# Altium PCB AT32.PcbDoc (part 5 of 9)
Units mm, origin at the board's own origin, x right, y up, seen from the top; angles counter-clockwise.
Board outline 152.1 x 84.6 mm, 2 copper layers (Top Layer, Bottom Layer); 49 components, 58 nets, 223 pads, 0 vias.
Unrouted connection lines stored in the file: 3.
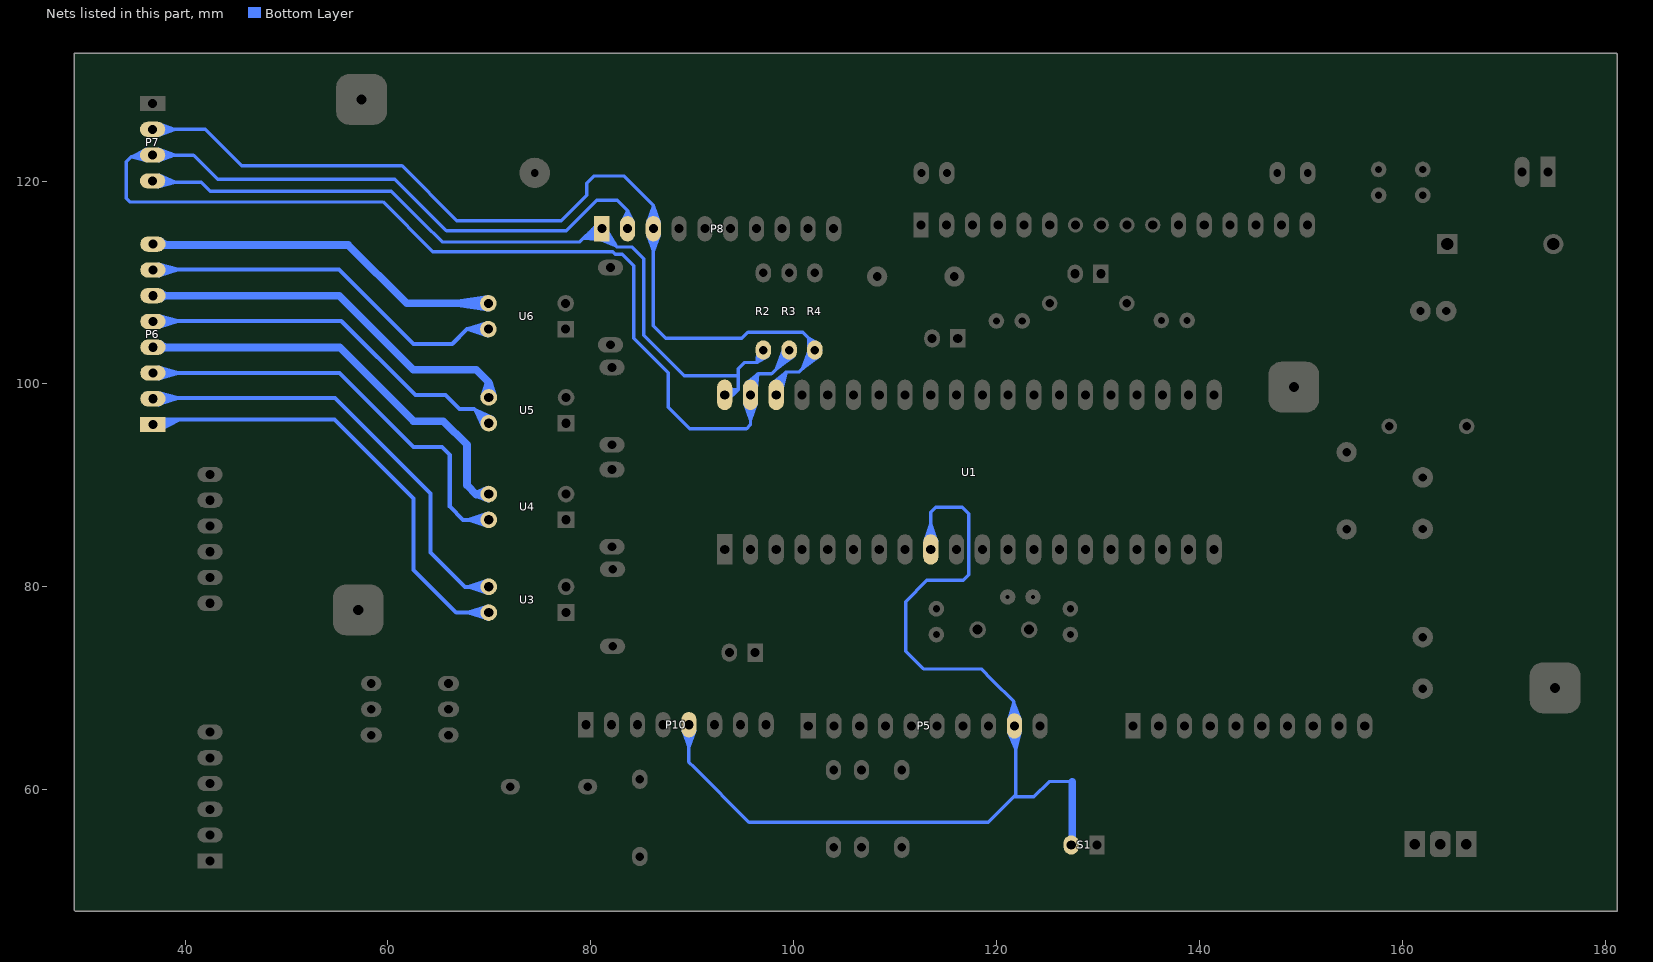
[diagram p5: the nets of this part, all layers, seen from the top]

## Nets (pads, with @x,y where several pads share a name; then routed paths per layer and width w, separated by ;. In a path a pad name is that pad's centre, name@x,y a point inside that pad or via, vN(x,y) a via of type N, cw(c..) or ccw(c..) an arc to the next point about the centre after c; other vN are vias at no path point) (continued)
NetP5_9: P5.9 P10.5 S1.2 U1.9 | length 355.2
  Bottom Layer w0.33: P10.5@89.261,65.492 cw(c88.263,64.494) 89.675,64.494 cw(c91.087,64.494) P10.5@90.089,65.492 ; P10.5@89.675,67.006 P10.5@89.675,66.406 89.675,62.725 90.2,62.2 95.6,56.8 119.2,56.8 121.7,59.3 ; U1.9@113.112,84.851 ccw(c112.114,85.849) 113.526,85.849 ccw(c114.938,85.849) U1.9@113.94,84.851 ; U1.9@113.526,83.687 113.526,87.353 114.024,87.85 116.619,87.85 117.28,87.189 117.28,81.193 116.72,80.633 113.128,80.633 111.04,78.544 111.04,73.66 112.8,71.9 118.5,71.9 119.6,70.8 121.7,68.7 121.7,66.4 121.9,66.2 121.9,59.3 ; P5.9@121.199,65.644 121.899,64.047 ; P5.9@121.352,65.372 cw(c120.03,64.05) 121.9,64.05 ; P5.9@121.352,67.2 ccw(c120.513,68.039) 121.7,68.039 ; P5.9@121.586,65.606 cw(c120.827,64.847) 121.9,64.847 ; 121.7,67.561 ccw(c122.541,67.561) P5.9@121.946,66.966 ; 121.7,68.358 ccw(c123.338,68.358) P5.9@122.18,67.2 ; 121.766,59.366 121.7,59.3 ; 121.9,64.697 cw(c122.855,64.697) P5.9@122.18,65.372 ; S1.2@127.3,54.6 S1.2@127.468,54.768 ; 127.468,60.8 125.2,60.8 123.7,59.3 121.9,59.3 ; P10.5@89.098,65.808 89.675,64.166 ; P10.5@89.098,65.808 89.675,64.166 ; P10.5@89.098,65.808 89.675,64.166 ; P10.5@89.098,65.808 89.675,64.166 ; P10.5@89.098,65.808 89.675,64.166 ; P10.5@89.098,65.808 89.675,64.166 ; P10.5@89.098,65.808 89.675,64.166 ; P10.5@89.421,65.887 89.675,64.166 ; P10.5@89.421,65.887 89.675,64.166 ; P10.5@89.421,65.887 89.675,64.166 ; P10.5@89.421,65.887 89.675,64.166 ; P10.5@89.421,65.887 89.675,64.166 ; P10.5@89.421,65.887 89.675,64.166 ; P10.5@89.421,65.887 89.675,64.166 ; 89.675,64.166 P10.5@90.252,65.808 ; 89.675,64.166 P10.5@89.929,65.887 ; 89.675,64.166 P10.5@89.675,65.906 ; 89.675,64.166 P10.5@90.252,65.808 ; 89.675,64.166 P10.5@89.929,65.887 ; 89.675,64.166 P10.5@89.675,65.906 ; 89.675,64.166 P10.5@90.252,65.808 ; 89.675,64.166 P10.5@89.929,65.887 ; 89.675,64.166 P10.5@89.675,65.906 ; 89.675,64.166 P10.5@90.252,65.808 ; 89.675,64.166 P10.5@89.929,65.887 ; 89.675,64.166 P10.5@89.675,65.906 ; 89.675,64.166 P10.5@90.252,65.808 ; 89.675,64.166 P10.5@89.929,65.887 ; 89.675,64.166 P10.5@89.675,65.906 ; 89.675,64.166 P10.5@90.252,65.808 ; 89.675,64.166 P10.5@89.929,65.887 ; 89.675,64.166 P10.5@89.675,65.906 ; 89.675,64.166 P10.5@90.252,65.808 ; 89.675,64.166 P10.5@89.929,65.887 ; 89.675,64.166 P10.5@89.675,65.906 ; U1.9@112.949,84.535 113.526,86.177 ; U1.9@112.949,84.535 113.526,86.177 ; U1.9@112.949,84.535 113.526,86.177 ; U1.9@112.949,84.535 113.526,86.177 ; U1.9@112.949,84.535 113.526,86.177 ; U1.9@112.949,84.535 113.526,86.177 ; U1.9@112.949,84.535 113.526,86.177 ; U1.9@113.272,84.456 113.526,86.177 ; U1.9@113.272,84.456 113.526,86.177 ; U1.9@113.272,84.456 113.526,86.177 ; U1.9@113.272,84.456 113.526,86.177 ; U1.9@113.272,84.456 113.526,86.177 ; U1.9@113.272,84.456 113.526,86.177 ; U1.9@113.272,84.456 113.526,86.177 ; U1.9@113.526,84.437 113.526,86.177 ; U1.9@113.526,84.437 113.526,86.177 ; U1.9@113.526,84.437 113.526,86.177 ; U1.9@113.526,84.437 113.526,86.177 ; U1.9@113.526,84.437 113.526,86.177 ; U1.9@113.526,84.437 113.526,86.177 ; U1.9@113.526,84.437 113.526,86.177 ; 113.526,86.177 U1.9@114.103,84.535 ; 113.526,86.177 U1.9@113.78,84.456 ; 113.526,86.177 U1.9@114.103,84.535 ; 113.526,86.177 U1.9@113.78,84.456 ; 113.526,86.177 U1.9@114.103,84.535 ; 113.526,86.177 U1.9@113.78,84.456 ; 113.526,86.177 U1.9@114.103,84.535 ; 113.526,86.177 U1.9@113.78,84.456 ; 113.526,86.177 U1.9@114.103,84.535 ; 113.526,86.177 U1.9@113.78,84.456 ; 113.526,86.177 U1.9@114.103,84.535 ; 113.526,86.177 U1.9@113.78,84.456 ; 113.526,86.177 U1.9@114.103,84.535 ; 113.526,86.177 U1.9@113.78,84.456 ; P5.9@121.186,66.862 121.7,68.527 ; P5.9@121.186,66.862 121.7,68.527 ; P5.9@121.186,66.862 121.7,68.527 ; P5.9@121.186,66.862 121.7,68.527 ; P5.9@121.186,66.862 121.7,68.527 ; P5.9@121.186,66.862 121.7,68.526 ; P5.9@121.186,66.862 121.7,68.527 ; P5.9@121.198,65.644 121.9,64.041 ; P5.9@121.198,65.644 121.9,64.041 ; P5.9@121.198,65.644 121.9,64.041 ; P5.9@121.198,65.644 121.9,64.041 ; P5.9@121.198,65.644 121.9,64.041 ; P5.9@121.198,65.644 121.9,64.041 ; P5.9@121.511,66.795 121.7,68.527 ; P5.9@121.511,66.795 121.7,68.527 ; P5.9@121.511,66.795 121.7,68.527 ; P5.9@121.511,66.795 121.7,68.527 ; P5.9@121.511,66.795 121.7,68.527 ; P5.9@121.511,66.795 121.7,68.526 ; P5.9@121.511,66.795 121.7,68.527 ; P5.9@121.514,65.748 121.9,64.041 ; P5.9@121.514,65.748 121.9,64.041 ; P5.9@121.514,65.748 121.9,64.041 ; P5.9@121.514,65.748 121.9,64.041 ; P5.9@121.514,65.748 121.9,64.041 ; P5.9@121.514,65.748 121.899,64.047 ; P5.9@121.514,65.748 121.9,64.041 ; 121.7,59.3 121.9,59.3 ; 121.7,68.526 P5.9@122.339,66.906 ; 121.7,68.526 P5.9@122.019,66.814 ; 121.7,68.526 P5.9@121.766,66.786 ; 121.7,68.527 P5.9@122.339,66.906 ; 121.7,68.527 P5.9@122.019,66.814 ; 121.7,68.527 P5.9@121.766,66.786 ; 121.7,68.527 P5.9@122.339,66.906 ; 121.7,68.527 P5.9@122.019,66.814 ; 121.7,68.527 P5.9@121.766,66.786 ; 121.7,68.527 P5.9@122.339,66.906 ; 121.7,68.527 P5.9@122.019,66.814 ; 121.7,68.527 P5.9@121.766,66.786 ; 121.7,68.527 P5.9@122.339,66.906 ; 121.7,68.527 P5.9@122.019,66.814 ; 121.7,68.527 P5.9@121.766,66.786 ; 121.7,68.527 P5.9@122.339,66.906 ; 121.7,68.527 P5.9@122.019,66.814 ; 121.7,68.527 P5.9@121.766,66.786 ; 121.7,68.527 P5.9@122.339,66.906 ; 121.7,68.527 P5.9@122.019,66.814 ; 121.7,68.527 P5.9@121.766,66.786 ; P5.9@121.766,65.786 121.9,64.041 ; P5.9@121.766,65.786 121.9,64.041 ; P5.9@121.766,65.786 121.9,64.041 ; P5.9@121.766,65.786 121.9,64.041 ; P5.9@121.766,65.786 121.9,64.041 ; P5.9@121.766,65.786 121.899,64.047 ; P5.9@121.766,65.786 121.9,64.041 ; 121.9,64.041 P5.9@122.349,65.733 ; 121.9,64.041 P5.9@122.021,65.787 ; 121.9,64.041 P5.9@122.349,65.733 ; 121.9,64.041 P5.9@122.021,65.787 ; 121.9,64.041 P5.9@122.349,65.733 ; 121.9,64.041 P5.9@122.021,65.787 ; 121.9,64.041 P5.9@122.349,65.733 ; 121.9,64.041 P5.9@122.021,65.787 ; 121.9,64.041 P5.9@122.349,65.733 ; 121.9,64.041 P5.9@122.021,65.787 ; 121.9,64.041 P5.9@122.349,65.733 ; 121.9,64.041 P5.9@122.021,65.787 ; 121.899,64.047 P5.9@122.349,65.732 ; 121.899,64.047 P5.9@122.021,65.787
  Bottom Layer w0.7: S1.2@127.468,54.768 127.468,60.8
NetP6_1: P6.1 U3.4 | length 140.2
  Bottom Layer w0.4: P6.1@37.1,96.5 54.731,96.5 62.527,88.704 62.527,81.673 66.736,77.464 U3.4@69.942,77.464 ; P6.1@37.15,96.181 cw(c37.921,95.41) P6.1@37.921,96.5 ; P6.1@37.267,96.551 39.332,96.501 ; P6.1@37.273,96.551 39.26,96.471 ; P6.1@37.433,95.898 cw(c38.887,94.444) 38.887,96.5 ; P6.1@37.529,95.492 39.26,96.471 ; P6.1@37.529,95.493 39.332,96.501 ; P6.1@37.716,95.615 cw(c39.852,93.479) 39.852,96.5 ; U3.4@69.504,77.026 ccw(c68.445,75.967) 68.445,77.464 ccw(c68.445,78.961) U3.4@69.504,77.902 ; U3.4@70.364,77.464 U3.4@69.942,77.464 ; P6.1@37.269,96.551 39.38,96.5 ; P6.1@37.269,96.551 39.38,96.5 ; P6.1@37.269,96.551 39.38,96.5 ; P6.1@37.327,96.004 39.38,96.5 ; P6.1@37.327,96.004 39.332,96.501 ; P6.1@37.327,96.004 39.38,96.5 ; P6.1@37.327,96.004 39.26,96.471 ; P6.1@37.327,96.004 39.38,96.5 ; P6.1@37.525,95.491 39.38,96.5 ; P6.1@37.525,95.491 39.38,96.5 ; P6.1@37.525,95.491 39.38,96.5 ; 67.922,77.464 U3.4@69.847,76.851 ; 67.922,77.464 U3.4@69.847,78.077 ; 67.922,77.464 U3.4@69.93,77.244 ; 67.922,77.464 U3.4@69.93,77.684 ; 67.922,77.464 U3.4@69.847,76.851 ; 67.922,77.464 U3.4@69.847,78.077 ; 67.922,77.464 U3.4@69.93,77.244 ; 67.922,77.464 U3.4@69.93,77.684 ; 67.922,77.464 U3.4@69.847,76.851 ; 67.922,77.464 U3.4@69.847,78.077 ; 67.922,77.464 U3.4@69.93,77.244 ; 67.922,77.464 U3.4@69.93,77.684 ; 67.922,77.464 U3.4@69.942,77.464 ; 67.922,77.464 U3.4@69.847,76.851 ; 67.922,77.464 U3.4@69.847,78.077 ; 67.922,77.464 U3.4@69.93,77.244 ; 67.922,77.464 U3.4@69.93,77.684 ; 67.922,77.464 U3.4@69.942,77.464 ; 67.922,77.464 U3.4@69.847,76.851 ; 67.922,77.464 U3.4@69.847,78.077 ; 67.922,77.464 U3.4@69.93,77.244 ; 67.922,77.464 U3.4@69.93,77.684 ; 67.922,77.464 U3.4@69.942,77.464 ; 67.922,77.464 U3.4@69.847,76.851 ; 67.922,77.464 U3.4@69.847,78.077 ; 67.922,77.464 U3.4@69.93,77.244 ; 67.922,77.464 U3.4@69.93,77.684 ; 67.922,77.464 U3.4@69.942,77.464
NetP6_2: P6.2 U3.3 | length 134.5
  Bottom Layer w0.4: P6.2@36.8,98.6 54.8,98.6 64.2,89.2 64.2,83.4 67.596,80.004 U3.3@69.942,80.004 ; P6.2@37.716,98.155 cw(c38.79,97.081) 38.79,98.6 ; P6.2@37.716,98.933 ccw(c38.52,99.737) 38.52,98.6 ; U3.3@69.504,79.566 ccw(c68.445,78.507) 68.445,80.004 ccw(c68.445,81.501) U3.3@69.504,80.442 ; P6.2@37.327,98.544 39.278,98.6 ; P6.2@37.327,98.544 39.278,98.6 ; P6.2@37.327,98.544 39.277,98.6 ; P6.2@37.327,98.544 39.278,98.6 ; P6.2@37.327,98.544 39.278,98.6 ; P6.2@37.389,99.091 39.278,98.6 ; P6.2@37.389,99.091 39.278,98.6 ; P6.2@37.389,99.09 39.277,98.6 ; P6.2@37.389,99.091 39.278,98.6 ; P6.2@37.389,99.091 39.278,98.6 ; P6.2@37.42,98.002 39.278,98.6 ; P6.2@37.42,98.002 39.278,98.6 ; P6.2@37.42,98.002 39.277,98.6 ; P6.2@37.42,98.002 39.278,98.6 ; P6.2@37.42,98.002 39.278,98.6 ; 67.922,80.004 U3.3@69.847,79.391 ; 67.922,80.004 U3.3@69.847,80.617 ; 67.922,80.004 U3.3@69.93,79.784 ; 67.922,80.004 U3.3@69.93,80.224 ; 67.922,80.004 U3.3@69.847,79.391 ; 67.922,80.004 U3.3@69.847,80.617 ; 67.922,80.004 U3.3@69.93,79.784 ; 67.922,80.004 U3.3@69.93,80.224 ; 67.922,80.004 U3.3@69.847,79.391 ; 67.922,80.004 U3.3@69.847,80.617 ; 67.922,80.004 U3.3@69.93,79.784 ; 67.922,80.004 U3.3@69.93,80.224 ; 67.922,80.004 U3.3@69.942,80.004 ; 67.922,80.004 U3.3@69.847,79.391 ; 67.922,80.004 U3.3@69.847,80.617 ; 67.922,80.004 U3.3@69.93,79.784 ; 67.922,80.004 U3.3@69.93,80.224 ; 67.922,80.004 U3.3@69.942,80.004 ; 67.922,80.004 U3.3@69.847,79.391 ; 67.922,80.004 U3.3@69.847,80.617 ; 67.922,80.004 U3.3@69.93,79.784 ; 67.922,80.004 U3.3@69.93,80.224 ; 67.922,80.004 U3.3@69.942,80.004 ; 67.922,80.004 U3.3@69.847,79.391 ; 67.922,80.004 U3.3@69.847,80.617 ; 67.922,80.004 U3.3@69.93,79.784 ; 67.922,80.004 U3.3@69.93,80.224 ; 67.922,80.004 U3.3@69.942,80.004
NetP6_3: P6.3 U4.4 | length 132.1
  Bottom Layer w0.4: P6.3@37.1,101.1 55.211,101.1 62.527,93.784 65.316,93.784 66.1,93 66.1,87.9 67.392,86.608 U4.4@69.942,86.608 ; P6.3@37.716,100.695 cw(c38.694,99.718) 38.694,101.1 ; P6.3@37.716,101.473 ccw(c38.616,102.373) 38.616,101.1 ; U4.4@69.504,86.17 ccw(c68.445,85.111) 68.445,86.608 ccw(c68.445,88.105) U4.4@69.504,87.046 ; P6.3@37.327,101.084 39.277,101.1 ; P6.3@37.327,101.084 39.277,101.1 ; P6.3@37.327,101.084 39.277,101.1 ; P6.3@37.327,101.084 39.277,101.1 ; P6.3@37.327,101.084 39.277,101.1 ; P6.3@37.4,101.629 39.277,101.1 ; P6.3@37.4,101.629 39.277,101.1 ; P6.3@37.4,101.629 39.277,101.1 ; P6.3@37.4,101.629 39.277,101.1 ; P6.3@37.4,101.629 39.277,101.1 ; P6.3@37.409,100.54 39.277,101.1 ; P6.3@37.409,100.54 39.277,101.1 ; P6.3@37.409,100.54 39.277,101.1 ; P6.3@37.409,100.54 39.277,101.1 ; P6.3@37.409,100.54 39.277,101.1 ; 67.922,86.608 U4.4@69.847,85.995 ; 67.922,86.608 U4.4@69.847,87.221 ; 67.922,86.608 U4.4@69.93,86.388 ; 67.922,86.608 U4.4@69.93,86.828 ; 67.922,86.608 U4.4@69.847,85.995 ; 67.922,86.608 U4.4@69.847,87.221 ; 67.922,86.608 U4.4@69.93,86.388 ; 67.922,86.608 U4.4@69.93,86.828 ; 67.922,86.608 U4.4@69.847,85.995 ; 67.922,86.608 U4.4@69.847,87.221 ; 67.922,86.608 U4.4@69.93,86.388 ; 67.922,86.608 U4.4@69.93,86.828 ; 67.922,86.608 U4.4@69.942,86.608 ; 67.922,86.608 U4.4@69.847,85.995 ; 67.922,86.608 U4.4@69.847,87.221 ; 67.922,86.608 U4.4@69.93,86.388 ; 67.922,86.608 U4.4@69.93,86.828 ; 67.922,86.608 U4.4@69.942,86.608 ; 67.922,86.608 U4.4@69.847,85.995 ; 67.922,86.608 U4.4@69.847,87.221 ; 67.922,86.608 U4.4@69.93,86.388 ; 67.922,86.608 U4.4@69.93,86.828 ; 67.922,86.608 U4.4@69.942,86.608 ; 67.922,86.608 U4.4@69.847,85.995 ; 67.922,86.608 U4.4@69.847,87.221 ; 67.922,86.608 U4.4@69.93,86.388 ; 67.922,86.608 U4.4@69.93,86.828 ; 67.922,86.608 U4.4@69.942,86.608
NetP6_4: P6.4 U4.3 | length 70.3
  Bottom Layer w0.75: P6.4@36.8,103.6 55.251,103.6 62.527,96.324 65.476,96.324 67.8,94 67.8,90 68.7,89.1 ; P6.4@37.592,103.359 cw(c38.174,102.777) 38.174,103.6 ; P6.4@37.592,103.889 ccw(c38.29,104.587) 38.29,103.6 ; 68.752,89.1 ccw(c68.752,90.338) U4.3@69.627,89.463 ; 68.984,89.1 cw(c68.984,88.19) U4.3@69.627,88.833 ; U4.3@69.285,89.1 68.7,89.1 ; P6.4@37.327,103.624 40.327,103.6 ; P6.4@37.327,103.624 40.327,103.6 ; P6.4@37.327,103.624 40.327,103.6 ; 68.7,89.1 U4.3@69.879,88.707 ; 68.7,89.1 U4.3@69.846,89.582 ; 68.7,89.1 U4.3@69.942,89.148 ; 68.7,89.1 U4.3@69.879,88.707 ; 68.7,89.1 U4.3@69.846,89.582 ; 68.7,89.1 U4.3@69.942,89.148 ; 68.7,89.1 U4.3@69.879,88.707 ; 68.7,89.1 U4.3@69.846,89.582 ; 68.7,89.1 U4.3@69.942,89.148 ; 68.7,89.1 U4.3@69.879,88.707 ; 68.7,89.1 U4.3@69.846,89.582 ; 68.7,89.1 U4.3@69.942,89.148 ; 68.7,89.1 U4.3@69.879,88.707 ; 68.7,89.1 U4.3@69.846,89.582
NetP6_5: P6.5 U5.4 | length 133.4
  Bottom Layer w0.4: P6.5@36.9,106.2 55.4,106.2 62.7,98.9 65.7,98.9 67.047,97.553 68.479,97.553 ; P6.5@37.395,106.71 39.277,106.2 ; P6.5@37.716,105.775 cw(c38.742,104.749) 38.742,106.2 ; P6.5@37.716,106.553 ccw(c38.568,107.405) 38.568,106.2 ; U5.4@69.322,96.133 ccw(c67.825,96.133) 68.884,97.191 ccw(c69.942,98.25) U5.4@69.942,96.753 ; P6.5@37.327,106.164 39.278,106.2 ; P6.5@37.327,106.164 39.278,106.2 ; P6.5@37.327,106.164 39.278,106.2 ; P6.5@37.327,106.164 39.277,106.2 ; P6.5@37.327,106.164 39.278,106.2 ; P6.5@37.395,106.71 39.278,106.2 ; P6.5@37.395,106.71 39.278,106.2 ; P6.5@37.395,106.71 39.278,106.2 ; P6.5@37.395,106.71 39.278,106.2 ; P6.5@37.415,105.621 39.278,106.2 ; P6.5@37.415,105.621 39.278,106.2 ; P6.5@37.415,105.621 39.278,106.2 ; P6.5@37.415,105.621 39.277,106.2 ; P6.5@37.415,105.621 39.278,106.2 ; 68.675,97.4 U5.4@69.942,96.133 ; 68.675,97.4 U5.4@69.434,95.777 ; 68.675,97.4 U5.4@70.298,96.641 ; 68.675,97.4 U5.4@69.777,95.987 ; 68.675,97.4 U5.4@70.088,96.298 ; 68.675,97.4 U5.4@69.942,96.133 ; 68.675,97.4 U5.4@69.434,95.777 ; 68.675,97.4 U5.4@70.298,96.641 ; 68.675,97.4 U5.4@69.777,95.987 ; 68.675,97.4 U5.4@70.088,96.298 ; 68.675,97.4 U5.4@69.942,96.133 ; 68.675,97.4 U5.4@69.434,95.777 ; 68.675,97.4 U5.4@70.298,96.641 ; 68.675,97.4 U5.4@69.777,95.987 ; 68.675,97.4 U5.4@70.088,96.298 ; 68.675,97.4 U5.4@69.942,96.133 ; 68.675,97.4 U5.4@69.434,95.777 ; 68.675,97.4 U5.4@70.298,96.641 ; 68.675,97.4 U5.4@69.777,95.987 ; 68.675,97.4 U5.4@70.088,96.298 ; 68.675,97.4 U5.4@69.942,96.133 ; 68.675,97.4 U5.4@69.434,95.777 ; 68.675,97.4 U5.4@70.298,96.641 ; 68.675,97.4 U5.4@69.777,95.987 ; 68.675,97.4 U5.4@70.088,96.298 ; 68.675,97.4 U5.4@69.942,96.133 ; 68.675,97.4 U5.4@69.434,95.777 ; 68.675,97.4 U5.4@70.298,96.641 ; 68.675,97.4 U5.4@69.777,95.987 ; 68.675,97.4 U5.4@70.088,96.298 ; 68.675,97.4 U5.4@69.942,96.133 ; 68.675,97.4 U5.4@69.434,95.777 ; 68.675,97.4 U5.4@70.298,96.641 ; 68.675,97.4 U5.4@69.777,95.987 ; 68.675,97.4 U5.4@70.088,96.298 ; 68.675,97.4 U5.4@69.942,96.133
NetP6_6: P6.6 U5.3 | length 64.9
  Bottom Layer w0.75: P6.6@37,108.7 55.2,108.7 62.5,101.4 68.7,101.4 69.942,100.158 ; P6.6@37.592,108.439 cw(c38.223,107.808) 38.223,108.7 ; P6.6@37.592,108.969 ccw(c38.242,109.619) 38.242,108.7 ; U5.3@69.627,98.988 ccw(c68.868,99.747) 69.942,99.747 ccw(c71.016,99.747) U5.3@70.257,98.988 ; P6.6@37.327,108.704 40.327,108.7 ; P6.6@37.327,108.704 40.327,108.7 ; P6.6@37.327,108.704 40.327,108.7 ; U5.3@69.502,98.74 69.942,100.158 ; U5.3@69.502,98.74 69.942,100.158 ; U5.3@69.502,98.74 69.942,100.158 ; U5.3@69.502,98.74 69.942,100.158 ; U5.3@69.942,98.673 69.942,100.158 ; U5.3@69.942,98.673 69.942,100.158 ; U5.3@69.942,98.673 69.942,100.158 ; 69.942,100.158 U5.3@70.382,98.74 ; 69.942,100.158 U5.3@70.382,98.74 ; 69.942,100.158 U5.3@70.382,98.74 ; 69.942,100.158 U5.3@70.382,98.74
NetP6_7: P6.7 U6.4 | length 126.9
  Bottom Layer w0.4: P6.7@36.9,111.3 55.171,111.3 62.527,103.944 66.344,103.944 67.804,105.404 U6.4@69.902,105.404 ; P6.7@37.716,110.855 cw(c38.79,109.781) 38.79,111.3 ; P6.7@37.716,111.633 ccw(c38.52,112.437) 38.52,111.3 ; U6.4@69.464,104.966 ccw(c68.405,103.907) 68.405,105.404 ccw(c68.405,106.901) U6.4@69.464,105.842 ; P6.7@37.327,111.244 39.278,111.3 ; P6.7@37.327,111.244 39.278,111.3 ; P6.7@37.327,111.244 39.278,111.3 ; P6.7@37.327,111.244 39.277,111.3 ; P6.7@37.327,111.244 39.278,111.3 ; P6.7@37.389,111.791 39.278,111.3 ; P6.7@37.389,111.791 39.278,111.3 ; P6.7@37.389,111.791 39.278,111.3 ; P6.7@37.389,111.79 39.277,111.3 ; P6.7@37.389,111.791 39.278,111.3 ; P6.7@37.42,110.702 39.278,111.3 ; P6.7@37.42,110.702 39.278,111.3 ; P6.7@37.42,110.702 39.278,111.3 ; P6.7@37.42,110.702 39.277,111.3 ; P6.7@37.42,110.702 39.278,111.3 ; 67.882,105.404 U6.4@69.807,104.791 ; 67.882,105.404 U6.4@69.807,106.017 ; 67.882,105.404 U6.4@69.89,105.184 ; 67.882,105.404 U6.4@69.89,105.624 ; 67.882,105.404 U6.4@69.807,104.791 ; 67.882,105.404 U6.4@69.807,106.017 ; 67.882,105.404 U6.4@69.89,105.184 ; 67.882,105.404 U6.4@69.89,105.624 ; 67.882,105.404 U6.4@69.807,104.791 ; 67.882,105.404 U6.4@69.807,106.017 ; 67.882,105.404 U6.4@69.89,105.184 ; 67.882,105.404 U6.4@69.89,105.624 ; 67.882,105.404 U6.4@69.902,105.404 ; 67.882,105.404 U6.4@69.807,104.791 ; 67.882,105.404 U6.4@69.807,106.017 ; 67.882,105.404 U6.4@69.89,105.184 ; 67.882,105.404 U6.4@69.89,105.624 ; 67.882,105.404 U6.4@69.902,105.404 ; 67.882,105.404 U6.4@69.807,104.791 ; 67.882,105.404 U6.4@69.807,106.017 ; 67.882,105.404 U6.4@69.89,105.184 ; 67.882,105.404 U6.4@69.89,105.624 ; 67.882,105.404 U6.4@69.902,105.404 ; 67.882,105.404 U6.4@69.807,104.791 ; 67.882,105.404 U6.4@69.807,106.017 ; 67.882,105.404 U6.4@69.89,105.184 ; 67.882,105.404 U6.4@69.89,105.624 ; 67.882,105.404 U6.4@69.902,105.404
NetP6_8: P6.8 U6.3 | length 77.7
  Bottom Layer w0.75: P6.8@36.9,113.7 56.1,113.7 61.856,107.944 U6.3@69.902,107.944 ; P6.8@37.592,114.049 ccw(c38.435,114.892) 38.435,113.7 ; 40.326,113.7 P6.8@37.327,113.784 ; U6.3@69.587,107.629 ccw(c68.828,106.87) 68.828,107.944 ccw(c68.828,109.018) U6.3@69.587,108.259 ; P6.8@37.327,113.784 40.33,113.7 P6.8@37.327,113.784 ; 66.832,107.944 U6.3@69.87,107.5 ; 66.832,107.944 U6.3@69.87,108.388 ; 66.832,107.944 U6.3@69.87,107.5 ; 66.832,107.944 U6.3@69.87,108.388 ; 66.832,107.944 U6.3@69.902,107.944 ; 66.832,107.944 U6.3@69.87,107.5 ; 66.832,107.944 U6.3@69.87,108.388 ; 66.832,107.944 U6.3@69.902,107.944 ; 66.832,107.944 U6.3@69.87,107.5 ; 66.832,107.944 U6.3@69.87,108.388
NetP7_2: P7.2 P8.3 R4.1 U1.38 | length 507.5
  Bottom Layer w0.33: P7.2@36.9,125.1 42,125.1 45.6,121.5 61.392,121.5 66.792,116.1 77.1,116.1 79.6,118.6 79.6,119.8 80.3,120.5 83.3,120.5 86.171,117.629 P8.3@86.171,115.31 86.171,105.729 87.4,104.5 94.9,104.5 95.5,105.1 100.9,105.1 101.353,104.647 cw(c100.223,103.517) R4.1@101.821,103.517 ; P7.2@37.714,124.69 cw(c38.703,123.701) 38.703,125.1 ; P7.2@37.714,125.518 ccw(c38.722,126.526) 38.722,125.1 ; P8.3@85.757,114.396 cw(c84.759,113.398) 86.171,113.398 cw(c87.583,113.398) P8.3@86.585,114.396 ; P8.3@85.757,116.224 ccw(c84.759,117.222) 86.171,117.222 ccw(c87.583,117.222) P8.3@86.585,116.224 ; U1.38@98.286,98.927 98.286,100.181 99.288,101.183 ; U1.38@98.536,99.725 cw(c99.652,99.94) 98.849,100.744 ; U1.38@98.86,99.788 cw(c100.389,100.083) 99.288,101.183 ; 100.766,101.407 ccw(c99.016,103.157) R4.1@101.491,103.157 ; 101.33,101.971 ccw(c100.143,103.157) R4.1@101.821,103.157 ; R4.1@101.491,103.517 101.491,104.509 ; R4.1@101.563,103.443 100.896,101.562 ; 101.724,104.276 ccw(c102.096,104.648) R4.1@102.096,104.122 ; 101.78,102.421 cw(c102.096,102.105) R4.1@102.096,102.552 ; R4.1@102.304,102.977 100.896,101.562 ; R4.1@102.519,102.724 100.896,101.562 ; R4.1@102.52,102.726 100.906,101.561 ; P7.2@37.3,125.104 39.04,125.1 ; P7.2@37.3,125.104 39.04,125.1 ; P7.2@37.3,125.104 39.04,125.1 ; P7.2@37.3,125.104 39.04,125.1 ; P7.2@37.3,125.104 39.04,125.1 ; P7.2@37.3,125.104 39.04,125.1 ; P7.2@37.3,125.104 39.04,125.1 ; P7.2@37.318,124.85 39.04,125.1 ; P7.2@37.318,124.85 39.04,125.1 ; P7.2@37.318,124.85 39.04,125.1 ; P7.2@37.318,124.85 39.04,125.1 ; P7.2@37.318,124.85 39.04,125.1 ; P7.2@37.318,124.85 39.04,125.1 ; P7.2@37.318,124.85 39.04,125.1 ; P7.2@37.319,125.358 39.04,125.1 ; P7.2@37.319,125.358 39.04,125.1 ; P7.2@37.319,125.358 39.04,125.1 ; P7.2@37.319,125.358 39.04,125.1 ; P7.2@37.319,125.358 39.04,125.1 ; P7.2@37.319,125.358 39.04,125.1 ; P7.2@37.319,125.358 39.04,125.1 ; P7.2@37.397,124.527 39.04,125.1 ; P7.2@37.397,124.527 39.04,125.1 ; P7.2@37.397,124.527 39.04,125.1 ; P7.2@37.397,124.527 39.04,125.1 ; P7.2@37.397,124.527 39.04,125.1 ; P7.2@37.397,124.527 39.04,125.1 ; P7.2@37.397,124.527 39.04,125.1 ; P7.2@37.4,125.68 39.04,125.1 ; P7.2@37.4,125.68 39.04,125.1 ; P7.2@37.4,125.68 39.04,125.1 ; P7.2@37.4,125.68 39.04,125.1 ; P7.2@37.4,125.68 39.04,125.1 ; P7.2@37.4,125.68 39.04,125.1 ; P7.2@37.4,125.68 39.04,125.1 ; P8.3@85.594,114.712 86.171,113.07 ; P8.3@85.594,114.712 86.171,113.07 ; P8.3@85.594,114.712 86.171,113.07 ; P8.3@85.594,114.712 86.171,113.07 ; P8.3@85.594,114.712 86.171,113.07 ; P8.3@85.594,114.712 86.171,113.07 ; P8.3@85.594,114.712 86.171,113.07 ; P8.3@85.594,115.908 86.171,117.55 ; P8.3@85.594,115.908 86.171,117.55 ; P8.3@85.594,115.908 86.171,117.55 ; P8.3@85.594,115.908 86.171,117.55 ; P8.3@85.594,115.908 86.171,117.55 ; P8.3@85.594,115.908 86.171,117.55 ; P8.3@85.594,115.908 86.171,117.55 ; P8.3@85.917,114.791 86.171,113.07 ; P8.3@85.917,114.791 86.171,113.07 ; P8.3@85.917,114.791 86.171,113.07 ; P8.3@85.917,114.791 86.171,113.07 ; P8.3@85.917,114.791 86.171,113.07 ; P8.3@85.917,114.791 86.171,113.07 ; P8.3@85.917,114.791 86.171,113.07 ; P8.3@85.917,115.829 86.171,117.55 ; P8.3@85.917,115.829 86.171,117.55 ; P8.3@85.917,115.829 86.171,117.55 ; P8.3@85.917,115.829 86.171,117.55 ; P8.3@85.917,115.829 86.171,117.55 ; P8.3@85.917,115.829 86.171,117.55 ; P8.3@85.917,115.829 86.171,117.55 ; 86.171,113.07 P8.3@86.748,114.712 ; 86.171,113.07 P8.3@86.425,114.791 ; 86.171,113.07 P8.3@86.171,114.81 ; 86.171,113.07 P8.3@86.748,114.712 ; 86.171,113.07 P8.3@86.425,114.791 ; 86.171,113.07 P8.3@86.171,114.81 ; 86.171,113.07 P8.3@86.748,114.712 ; 86.171,113.07 P8.3@86.425,114.791 ; 86.171,113.07 P8.3@86.171,114.81 ; 86.171,113.07 P8.3@86.748,114.712 ; 86.171,113.07 P8.3@86.425,114.791 ; 86.171,113.07 P8.3@86.171,114.81 ; 86.171,113.07 P8.3@86.748,114.712 ; 86.171,113.07 P8.3@86.425,114.791 ; 86.171,113.07 P8.3@86.171,114.81 ; 86.171,113.07 P8.3@86.748,114.712 ; 86.171,113.07 P8.3@86.425,114.791 ; 86.171,113.07 P8.3@86.171,114.81 ; 86.171,113.07 P8.3@86.748,114.712 ; 86.171,113.07 P8.3@86.425,114.791 ; 86.171,113.07 P8.3@86.171,114.81 ; P8.3@86.171,115.81 86.171,117.55 ; P8.3@86.171,115.81 86.171,117.55 ; P8.3@86.171,115.81 86.171,117.55 ; P8.3@86.171,115.81 86.171,117.55 ; P8.3@86.171,115.81 86.171,117.55 ; P8.3@86.171,115.81 86.171,117.55 ; P8.3@86.171,115.81 86.171,117.55 ; 86.171,117.55 P8.3@86.748,115.908 ; 86.171,117.55 P8.3@86.425,115.829 ; 86.171,117.55 P8.3@86.748,115.908 ; 86.171,117.55 P8.3@86.425,115.829 ; 86.171,117.55 P8.3@86.748,115.908 ; 86.171,117.55 P8.3@86.425,115.829 ; 86.171,117.55 P8.3@86.748,115.908 ; 86.171,117.55 P8.3@86.425,115.829 ; 86.171,117.55 P8.3@86.748,115.908 ; 86.171,117.55 P8.3@86.425,115.829 ; 86.171,117.55 P8.3@86.748,115.908 ; 86.171,117.55 P8.3@86.425,115.829 ; 86.171,117.55 P8.3@86.748,115.908 ; 86.171,117.55 P8.3@86.425,115.829 ; U1.38@97.858,100.076 99.288,101.183 ; U1.38@97.858,100.076 99.288,101.183 ; U1.38@97.858,100.076 99.288,101.183 ; U1.38@97.858,100.076 99.288,101.183 ; U1.38@97.858,100.076 99.288,101.183 ; U1.38@97.858,100.076 99.288,101.183 ; U1.38@97.858,100.076 99.288,101.183 ; U1.38@98.084,99.833 99.288,101.183 ; U1.38@98.084,99.833 99.288,101.183 ; U1.38@98.084,99.833 99.288,101.183 ; U1.38@98.084,99.833 99.288,101.183 ; U1.38@98.084,99.833 99.288,101.183 ; U1.38@98.084,99.833 99.288,101.183 ; U1.38@98.084,99.833 99.288,101.183 ; U1.38@98.286,99.677 99.288,101.183 ; U1.38@98.286,99.677 99.288,101.183 ; U1.38@98.286,99.677 99.288,101.183 ; U1.38@98.286,99.677 99.288,101.183 ; U1.38@98.286,99.677 99.288,101.183 ; U1.38@98.286,99.677 99.288,101.183 ; U1.38@98.286,99.677 99.288,101.183 ; U1.38@98.508,99.551 99.288,101.183 ; U1.38@98.508,99.551 99.288,101.183 ; U1.38@98.508,99.551 99.288,101.183 ; U1.38@98.508,99.551 99.288,101.183 ; U1.38@98.508,99.551 99.288,101.183 ; U1.38@98.508,99.551 99.288,101.183 ; U1.38@98.508,99.551 99.288,101.183 ; U1.38@98.819,99.436 99.288,101.183 ; U1.38@98.819,99.436 99.288,101.183 ; U1.38@98.819,99.436 99.288,101.183 ; U1.38@98.819,99.436 99.288,101.183 ; U1.38@98.819,99.436 99.288,101.183 ; U1.38@98.819,99.436 99.288,101.183 ; U1.38@98.819,99.436 99.288,101.183 ; 99.288,101.183 100.542,101.183 102.679,103.321 101.491,104.509 ; 100.866,101.507 R4.1@102.523,102.728 ; 100.866,101.507 R4.1@101.563,103.443 ; 100.866,101.507 R4.1@102.305,102.978 ; 100.866,101.507 R4.1@101.865,103.306 ; 100.866,101.507 R4.1@102.096,103.157 ; 100.866,101.507 R4.1@102.523,102.728 ; 100.866,101.507 R4.1@101.563,103.443 ; 100.866,101.507 R4.1@102.305,102.978 ; 100.866,101.507 R4.1@101.865,103.306 ; 100.866,101.507 R4.1@102.096,103.157 ; 100.866,101.507 R4.1@102.523,102.728 ; 100.866,101.507 R4.1@101.563,103.443 ; 100.866,101.507 R4.1@102.305,102.978 ; 100.866,101.507 R4.1@101.865,103.306 ; 100.866,101.507 R4.1@102.096,103.157 ; 100.868,101.513 R4.1@102.522,102.727 ; 100.868,101.513 R4.1@101.563,103.444 ; 100.868,101.513 R4.1@102.305,102.978 ; 100.868,101.513 R4.1@101.865,103.306 ; 100.868,101.513 R4.1@102.096,103.157 ; 100.89,101.532 R4.1@102.523,102.728 ; 100.89,101.532 101.562,103.441 100.906,101.561 ; 100.89,101.532 R4.1@102.305,102.979 ; 100.89,101.532 101.865,103.305 100.906,101.561 ; 100.89,101.532 R4.1@102.096,103.157 ; 100.896,101.562 R4.1@101.865,103.307 ; 100.896,101.562 R4.1@102.096,103.157 ; 100.906,101.561 R4.1@102.305,102.978 ; 100.906,101.561 R4.1@102.096,103.157 ; 101.491,104.509 R4.1@101.515,103.347 ; 101.491,104.509 R4.1@102.513,103.956 ; 101.491,104.509 R4.1@101.846,103.403 ; 101.491,104.509 R4.1@102.312,103.687 ; 101.491,104.509 R4.1@102.096,103.517 ; 101.491,104.509 R4.1@101.515,103.347 ; 101.491,104.509 R4.1@102.513,103.956 ; 101.491,104.509 R4.1@101.846,103.403 ; 101.491,104.509 R4.1@102.312,103.687 ; 101.491,104.509 R4.1@102.096,103.517 ; 101.491,104.509 R4.1@101.515,103.347 ; 101.491,104.509 R4.1@102.513,103.956 ; 101.491,104.509 R4.1@101.846,103.403 ; 101.491,104.509 R4.1@102.312,103.687 ; 101.491,104.509 R4.1@102.096,103.517 ; 101.491,104.509 R4.1@101.515,103.347 ; 101.491,104.509 R4.1@102.513,103.956 ; 101.491,104.509 R4.1@101.846,103.403 ; 101.491,104.509 R4.1@102.312,103.687 ; 101.491,104.509 R4.1@102.096,103.517 ; 101.491,104.509 R4.1@101.515,103.347 ; 101.491,104.509 R4.1@102.513,103.956 ; 101.491,104.509 R4.1@101.846,103.403 ; 101.491,104.509 R4.1@102.312,103.687 ; 101.491,104.509 R4.1@102.096,103.517 ; 101.491,104.509 R4.1@101.515,103.347 ; 101.491,104.509 R4.1@102.513,103.956 ; 101.491,104.509 R4.1@101.846,103.403 ; 101.491,104.509 R4.1@102.312,103.687 ; 101.491,104.509 R4.1@102.096,103.517 ; 101.491,104.509 R4.1@101.515,103.347 ; 101.491,104.509 R4.1@102.513,103.956 ; 101.491,104.509 R4.1@101.846,103.403 ; 101.491,104.509 R4.1@102.312,103.687 ; 101.491,104.509 R4.1@102.096,103.517 ; 101.491,104.509 R4.1@101.515,103.347 ; 101.491,104.509 R4.1@102.513,103.956 ; 101.491,104.509 R4.1@101.846,103.403 ; 101.491,104.509 R4.1@102.312,103.687 ; 101.491,104.509 R4.1@102.096,103.517 ; 101.491,104.509 R4.1@101.515,103.347 ; 101.491,104.509 R4.1@102.513,103.956 ; 101.491,104.509 R4.1@101.846,103.403 ; 101.491,104.509 R4.1@102.312,103.687 ; 101.491,104.509 R4.1@102.096,103.517 ; 101.491,104.509 R4.1@101.515,103.347 ; 101.491,104.509 R4.1@102.513,103.956 ; 101.491,104.509 R4.1@101.846,103.403 ; 101.491,104.509 R4.1@102.312,103.687 ; 101.491,104.509 R4.1@102.096,103.517 ; 101.491,104.509 R4.1@101.515,103.347 ; 101.491,104.509 R4.1@102.513,103.956 ; 101.491,104.509 R4.1@101.846,103.403 ; 101.491,104.509 R4.1@102.312,103.687 ; 101.491,104.509 R4.1@102.096,103.517 ; 101.491,104.509 R4.1@101.515,103.347 ; 101.491,104.509 R4.1@102.513,103.956 ; 101.491,104.509 R4.1@101.846,103.403 ; 101.491,104.509 R4.1@102.312,103.687 ; 101.491,104.509 R4.1@102.096,103.517 ; 101.491,104.509 R4.1@101.515,103.347 ; 101.491,104.509 R4.1@102.513,103.956 ; 101.491,104.509 R4.1@101.846,103.403 ; 101.491,104.509 R4.1@102.312,103.687 ; 101.491,104.509 R4.1@102.096,103.517 ; 101.491,104.509 R4.1@101.515,103.347 ; 101.491,104.509 R4.1@102.513,103.956 ; 101.491,104.509 R4.1@101.846,103.403 ; 101.491,104.509 R4.1@102.312,103.687 ; 101.491,104.509 R4.1@102.096,103.517
NetP7_3: P7.3 P8.2 R3.1 U1.39 | length 509.3
  Bottom Layer w0.33: 35.284,122.4 cw(c35.284,121.548) P7.3@35.886,122.15 ; 35.405,122.4 ccw(c35.405,123.31) P7.3@36.104,122.727 ; P7.3@35.851,122.939 cw(c34.7,123.898) 34.7,122.4 ; P7.3@36.9,122.564 40.836,122.564 43.2,120.2 60.67,120.2 65.77,115.1 77.6,115.1 80.6,118.1 82.6,118.1 83.631,117.069 ; P7.3@37.714,122.15 cw(c38.712,121.152) 38.712,122.564 cw(c38.712,123.976) P7.3@37.714,122.978 ; P7.3@37.9,122.4 34.7,122.4 ; P8.2@83.254,116.257 ccw(c82.569,117.069) 83.631,117.069 ; P8.2@83.631,115.31 83.631,117.069 ; P8.2@84.008,116.257 cw(c84.693,117.069) 83.631,117.069 ; U1.39@95.332,97.763 cw(c94.334,96.765) 95.746,96.765 cw(c97.158,96.765) U1.39@96.16,97.763 ; U1.39@95.746,98.927 U1.39@95.746,98.919 ; U1.39@95.98,99.779 cw(c96.707,100.099) 96.145,100.66 ; U1.39@96.282,99.912 cw(c97.182,100.307) 96.487,101.002 ; 98.226,101.407 ccw(c96.476,103.157) R3.1@98.951,103.157 ; 98.79,101.971 ccw(c97.603,103.157) R3.1@99.281,103.157 ; R3.1@99.022,103.441 98.347,101.529 ; R3.1@99.022,103.442 98.36,101.562 ; R3.1@99.024,103.446 98.347,101.565 ; R3.1@99.025,103.448 98.313,101.518 ; 99.24,102.421 cw(c99.556,102.105) R3.1@99.556,102.552 ; R3.1@99.325,103.306 98.347,101.529 ; R3.1@99.556,102.737 97.821,101.002 96.487,101.002 ; R3.1@99.763,102.976 98.347,101.565 ; R3.1@99.977,102.722 98.347,101.565 ; R3.1@99.979,102.724 98.313,101.518 ; R3.1@99.979,102.725 98.36,101.562 ; 34.7,122.4 34.2,121.9 34.2,118.3 34.558,117.942 59.522,117.942 64.424,113.04 82.16,113.04 82.4,112.8 83.1,112.8 84.241,111.659 84.241,104.499 87.64,101.1 87.64,97.7 89.76,95.58 95.358,95.58 95.746,95.968 U1.39@95.746,98.919 ; 34.7,122.4 P7.3@36.253,121.981 ; 34.7,122.4 P7.3@36.136,123.125 ; 34.7,122.4 P7.3@36.306,122.309 ; 34.7,122.4 P7.3@36.254,122.815 ; 34.7,122.4 P7.3@36.3,122.564 ; 34.7,122.4 P7.3@36.253,121.981 ; 34.7,122.4 P7.3@36.136,123.125 ; 34.7,122.4 P7.3@36.306,122.309 ; 34.7,122.4 P7.3@36.254,122.815 ; 34.7,122.4 P7.3@36.3,122.564 ; 34.7,122.4 P7.3@36.253,121.981 ; 34.7,122.4 P7.3@36.136,123.125 ; 34.7,122.4 P7.3@36.306,122.309 ; 34.7,122.4 P7.3@36.254,122.815 ; 34.7,122.4 P7.3@36.3,122.564 ; 34.7,122.4 P7.3@36.253,121.981 ; 34.7,122.4 P7.3@36.136,123.125 ; 34.7,122.4 P7.3@36.306,122.309 ; 34.7,122.4 P7.3@36.254,122.815 ; 34.7,122.4 P7.3@36.3,122.564 ; 34.7,122.4 P7.3@36.253,121.981 ; 34.7,122.4 P7.3@36.136,123.125 ; 34.7,122.4 P7.3@36.306,122.309 ; 34.7,122.4 P7.3@36.254,122.815 ; 34.7,122.4 P7.3@36.3,122.564 ; 34.7,122.4 P7.3@36.253,121.981 ; 34.7,122.4 P7.3@36.136,123.125 ; 34.7,122.4 P7.3@36.306,122.309 ; 34.7,122.4 P7.3@36.254,122.815 ; 34.7,122.4 P7.3@36.3,122.564 ; 34.7,122.4 P7.3@36.253,121.981 ; 34.7,122.4 P7.3@36.136,123.125 ; 34.7,122.4 P7.3@36.306,122.309 ; 34.7,122.4 P7.3@36.254,122.815 ; 34.7,122.4 P7.3@36.3,122.564 ; P7.3@37.3,122.564 39.04,122.564 ; P7.3@37.3,122.564 39.04,122.564 ; P7.3@37.3,122.564 39.04,122.564 ; P7.3@37.3,122.564 39.04,122.564 ; P7.3@37.3,122.564 39.04,122.564 ; P7.3@37.3,122.564 39.04,122.564 ; P7.3@37.3,122.564 39.04,122.564 ; P7.3@37.319,122.31 39.04,122.564 ; P7.3@37.319,122.31 39.04,122.564 ; P7.3@37.319,122.31 39.04,122.564 ; P7.3@37.319,122.31 39.04,122.564 ; P7.3@37.319,122.31 39.04,122.564 ; P7.3@37.319,122.31 39.04,122.564 ; P7.3@37.319,122.31 39.04,122.564 ; P7.3@37.319,122.818 39.04,122.564 ; P7.3@37.319,122.818 39.04,122.564 ; P7.3@37.319,122.818 39.04,122.564 ; P7.3@37.319,122.818 39.04,122.564 ; P7.3@37.319,122.818 39.04,122.564 ; P7.3@37.319,122.818 39.04,122.564 ; P7.3@37.319,122.818 39.04,122.564 ; P7.3@37.398,121.987 39.04,122.564 ; P7.3@37.398,121.987 39.04,122.564 ; P7.3@37.398,121.987 39.04,122.564 ; P7.3@37.398,121.987 39.04,122.564 ; P7.3@37.398,121.987 39.04,122.564 ; P7.3@37.398,121.987 39.04,122.564 ; P7.3@37.398,121.987 39.04,122.564 ; P7.3@37.398,123.141 39.04,122.564 ; P7.3@37.398,123.141 39.04,122.564 ; P7.3@37.398,123.141 39.04,122.564 ; P7.3@37.398,123.141 39.04,122.564 ; P7.3@37.398,123.141 39.04,122.564 ; P7.3@37.398,123.141 39.04,122.564 ; P7.3@37.398,123.141 39.04,122.564 ; P8.2@83.062,115.946 83.631,117.069 ; P8.2@83.062,115.946 83.631,117.069 ; P8.2@83.062,115.946 83.631,117.069 ; P8.2@83.062,115.946 83.631,117.069 ; P8.2@83.062,115.946 83.631,117.069 ; P8.2@83.062,115.946 83.631,117.069 ; P8.2@83.062,115.946 83.631,117.069 ; P8.2@83.377,115.836 83.631,117.069 ; P8.2@83.377,115.836 83.631,117.069 ; P8.2@83.377,115.836 83.631,117.069 ; P8.2@83.377,115.836 83.631,117.069 ; P8.2@83.377,115.836 83.631,117.069 ; P8.2@83.377,115.836 83.631,117.069 ; P8.2@83.377,115.836 83.631,117.069 ; P8.2@83.631,115.81 83.631,117.069 ; P8.2@83.631,115.81 83.631,117.069 ; P8.2@83.631,115.81 83.631,117.069 ; P8.2@83.631,115.81 83.631,117.069 ; P8.2@83.631,115.81 83.631,117.069 ; P8.2@83.631,115.81 83.631,117.069 ; P8.2@83.631,115.81 83.631,117.069 ; 83.631,117.069 P8.2@84.2,115.946 ; 83.631,117.069 P8.2@83.885,115.836 ; 83.631,117.069 P8.2@84.2,115.946 ; 83.631,117.069 P8.2@83.885,115.836 ; 83.631,117.069 P8.2@84.2,115.946 ; 83.631,117.069 P8.2@83.885,115.836 ; 83.631,117.069 P8.2@84.2,115.946 ; 83.631,117.069 P8.2@83.885,115.836 ; 83.631,117.069 P8.2@84.2,115.946 ; 83.631,117.069 P8.2@83.885,115.836 ; 83.631,117.069 P8.2@84.2,115.946 ; 83.631,117.069 P8.2@83.885,115.836 ; 83.631,117.069 P8.2@84.2,115.946 ; 83.631,117.069 P8.2@83.885,115.836 ; U1.39@95.169,98.079 95.746,96.437 ; U1.39@95.169,98.079 95.746,96.437 ; U1.39@95.169,98.079 95.746,96.437 ; U1.39@95.169,98.079 95.746,96.437 ; U1.39@95.169,98.079 95.746,96.437 ; U1.39@95.169,98.079 95.746,96.437 ; U1.39@95.169,98.079 95.746,96.437 ; U1.39@95.3,100.056 96.487,101.002 ; U1.39@95.3,100.056 96.487,101.002 ; U1.39@95.3,100.056 96.487,101.002 ; U1.39@95.3,100.056 96.487,101.002 ; U1.39@95.3,100.056 96.487,101.002 ; U1.39@95.3,100.056 96.487,101.002 ; U1.39@95.3,100.056 96.487,101.002 ; U1.39@95.492,98.158 95.746,96.437 ; U1.39@95.492,98.158 95.746,96.437 ; U1.39@95.492,98.158 95.746,96.437 ; U1.39@95.492,98.158 95.746,96.437 ; U1.39@95.492,98.158 95.746,96.437 ; U1.39@95.492,98.158 95.746,96.437 ; U1.39@95.492,98.158 95.746,96.437 ; U1.39@95.535,99.82 96.487,101.002 ; U1.39@95.535,99.82 96.487,101.002 ; U1.39@95.535,99.82 96.487,101.002 ; U1.39@95.535,99.82 96.487,101.002 ; U1.39@95.535,99.82 96.487,101.002 ; U1.39@95.535,99.82 96.487,101.002 ; U1.39@95.535,99.82 96.487,101.002 ; 95.746,96.437 U1.39@96.323,98.079 ; 95.746,96.437 U1.39@96,98.158 ; 95.746,96.437 U1.39@95.746,98.177 ; 95.746,96.437 U1.39@96.323,98.079 ; 95.746,96.437 U1.39@96,98.158 ; 95.746,96.437 U1.39@95.746,98.177 ; 95.746,96.437 U1.39@96.323,98.079 ; 95.746,96.437 U1.39@96,98.158 ; 95.746,96.437 U1.39@95.746,98.177 ; 95.746,96.437 U1.39@96.323,98.079 ; 95.746,96.437 U1.39@96,98.158 ; 95.746,96.437 U1.39@95.746,98.177 ; 95.746,96.437 U1.39@96.323,98.079 ; 95.746,96.437 U1.39@96,98.158 ; 95.746,96.437 U1.39@95.746,98.177 ; 95.746,96.437 U1.39@96.323,98.079 ; 95.746,96.437 U1.39@96,98.158 ; 95.746,96.437 U1.39@95.746,98.177 ; 95.746,96.437 U1.39@96.323,98.079 ; 95.746,96.437 U1.39@96,98.158 ; 95.746,96.437 U1.39@95.746,98.177 ; U1.39@95.746,98.919 95.98,98.919 95.98,100.495 96.487,101.002 ; U1.39@95.746,99.677 96.487,101.002 ; U1.39@95.746,99.677 96.487,101.002 ; U1.39@95.746,99.677 96.487,101.002 ; U1.39@95.746,99.677 96.487,101.002 ; U1.39@95.746,99.677 96.487,101.002 ; U1.39@95.746,99.677 96.487,101.002 ; U1.39@95.746,99.677 96.487,101.002 ; U1.39@95.978,99.572 96.487,101.002 ; U1.39@95.978,99.572 96.487,101.002 ; U1.39@95.978,99.572 96.487,101.002 ; U1.39@95.978,99.572 96.487,101.002 ; U1.39@95.978,99.572 96.487,101.002 ; U1.39@95.978,99.572 96.487,101.002 ; U1.39@95.978,99.572 96.487,101.002 ; U1.39@96.302,99.495 96.487,101.002 ; U1.39@96.302,99.495 96.487,101.002 ; U1.39@96.302,99.495 96.487,101.002 ; U1.39@96.302,99.495 96.487,101.002 ; U1.39@96.302,99.495 96.487,101.002 ; U1.39@96.302,99.495 96.487,101.002 ; U1.39@96.302,99.495 96.487,101.002 ; 98.299,101.48 R3.1@99.983,102.728 ; 98.299,101.48 R3.1@99.025,103.446 ; 98.299,101.48 R3.1@99.765,102.978 ; 98.299,101.48 R3.1@99.326,103.307 ; 98.299,101.48 R3.1@99.556,103.157 ; 98.299,101.48 R3.1@99.983,102.728 ; 98.299,101.48 R3.1@99.025,103.446 ; 98.299,101.48 R3.1@99.765,102.978 ; 98.299,101.48 R3.1@99.326,103.307 ; 98.299,101.48 R3.1@99.556,103.157 ; 98.299,101.48 R3.1@99.983,102.728 ; 98.299,101.48 R3.1@99.025,103.446 ; 98.299,101.48 R3.1@99.765,102.978 ; 98.299,101.48 R3.1@99.326,103.307 ; 98.299,101.48 R3.1@99.556,103.157 ; 98.313,101.518 99.763,102.977 98.36,101.562 ; 98.313,101.518 99.326,103.308 98.347,101.565 ; 98.313,101.518 R3.1@99.556,103.157 ; 98.347,101.565 R3.1@99.556,103.157 ; 98.347,101.529 R3.1@99.982,102.728 ; 98.347,101.529 R3.1@99.765,102.978 ; 98.347,101.529 R3.1@99.556,103.157 ; 98.36,101.562 R3.1@99.325,103.306 ; 98.36,101.562 R3.1@99.556,103.157
NetP7_4: P7.4 P8.1 R2.1 U1.40 | length 425.6
  Bottom Layer w0.33: P7.4@37,119.9 41.6,119.9 42.5,119 60.336,119 63.456,115.88 65.336,114 78.918,114 80.228,115.31 ; P7.4@37.48,120.204 ccw(c38.215,120.939) 38.215,119.9 ; P7.4@37.714,119.61 cw(c38.413,118.911) 38.413,119.9 ; P7.4@37.714,120.438 ccw(c39.012,121.736) 39.012,119.9 ; 79.415,114.497 cw(c80.57,113.342) P8.1@81.116,114.881 ; 79.784,114.866 cw(c80.763,113.887) P8.1@81.227,115.192 ; 79.797,114.879 cw(c80.246,114.429) P8.1@80.686,114.888 ; 80.035,115.117 cw(c80.479,114.673) P8.1@80.914,115.126 ; 80.154,115.235 cw(c80.957,114.432) P8.1@81.337,115.503 ; 80.273,115.355 cw(c80.713,114.916) P8.1@81.143,115.364 ; P8.1@80.548,115.094 ccw(c80.228,114.966) 80.228,115.31 ; P8.1@80.548,115.526 cw(c80.228,115.654) 80.228,115.31 ; P8.1@80.788,114.31 82.47,113.631 ; P8.1@80.866,115.35 79.295,114.377 ; P8.1@80.881,115.356 79.445,114.492 ; P8.1@80.939,114.605 82.47,113.631 ; P8.1@81.014,115.053 79.295,114.377 ; P8.1@81.021,115.055 79.445,114.471 ; P8.1@81.024,115.056 79.445,114.492 ; P8.1@81.091,114.225 cw(c81.091,112.332) 82.429,113.671 ; P8.1@81.091,114.555 cw(c81.091,113.459) 81.866,114.234 ; P8.1@81.1,114.225 79.445,114.492 ; P8.1@81.107,114.225 79.445,114.471 ; P8.1@81.116,114.226 79.38,114.444 ; P8.1@81.12,114.557 79.445,114.492 ; P8.1@81.123,114.557 79.445,114.471 ; P8.1@81.133,114.559 79.295,114.377 ; P8.1@81.136,114.227 79.295,114.377 ; P8.1@81.676,114.81 ccw(c82.608,114.81) 81.949,114.151 ; 94.547,100.82 89.2,100.82 85.24,104.78 85.24,112.36 84.1,113.5 82.6,113.5 81.585,114.515 81.091,114.515 P8.1@81.091,115.31 ; 96.7,102.421 cw(c97.016,102.105) R2.1@97.016,102.552 ; R2.1@97.016,102.737 96.399,102.12 ; P7.4@37.3,120.024 39.044,119.9 ; P7.4@37.3,120.024 39.044,119.9 ; P7.4@37.3,120.024 39.044,119.9 ; P7.4@37.3,120.024 39.044,119.9 ; P7.4@37.3,120.024 39.044,119.9 ; P7.4@37.3,120.024 39.044,119.9 ; P7.4@37.3,120.024 39.039,119.9 ; P7.4@37.301,119.769 39.044,119.9 ; P7.4@37.301,119.769 39.044,119.9 ; P7.4@37.301,119.769 39.044,119.9 ; P7.4@37.301,119.769 39.044,119.9 ; P7.4@37.301,119.769 39.044,119.9 ; P7.4@37.301,119.769 39.044,119.9 ; P7.4@37.301,119.769 39.039,119.9 ; P7.4@37.337,120.276 39.044,119.9 ; P7.4@37.337,120.276 39.044,119.9 ; P7.4@37.337,120.276 39.044,119.9 ; P7.4@37.337,120.276 39.044,119.9 ; P7.4@37.337,120.276 39.044,119.9 ; P7.4@37.337,120.276 39.044,119.9 ; P7.4@37.337,120.276 39.039,119.9 ; P7.4@37.357,119.442 39.044,119.9 ; P7.4@37.357,119.442 39.044,119.9 ; P7.4@37.357,119.442 39.044,119.9 ; P7.4@37.357,119.442 39.044,119.9 ; P7.4@37.357,119.442 39.044,119.9 ; P7.4@37.357,119.442 39.044,119.9 ; P7.4@37.357,119.442 39.039,119.9 ; P7.4@37.439,120.592 39.044,119.9 ; P7.4@37.439,120.592 39.044,119.9 ; P7.4@37.439,120.592 39.044,119.9 ; P7.4@37.439,120.592 39.044,119.9 ; P7.4@37.439,120.592 39.044,119.9 ; P7.4@37.439,120.592 39.044,119.9 ; P7.4@37.439,120.592 39.039,119.9 ; 79.295,114.377 P8.1@81.091,114.81 ; 79.357,114.439 P8.1@81.117,114.226 ; 79.357,114.439 P8.1@80.876,115.354 ; 79.357,114.439 P8.1@81.126,114.557 ; 79.357,114.439 P8.1@81.02,115.055 ; 79.357,114.439 P8.1@81.091,114.81 ; 79.357,114.439 P8.1@81.117,114.226 ; 79.357,114.439 P8.1@80.876,115.354 ; 79.357,114.439 P8.1@81.126,114.557 ; 79.357,114.439 P8.1@81.02,115.055 ; 79.357,114.439 P8.1@81.091,114.81 ; 79.357,114.439 P8.1@81.117,114.226 ; 79.357,114.439 P8.1@80.876,115.354 ; 79.357,114.439 P8.1@81.126,114.557 ; 79.357,114.439 P8.1@81.02,115.055 ; 79.357,114.439 P8.1@81.091,114.81 ; 79.38,114.444 80.875,115.354 79.445,114.471 ; 79.38,114.444 P8.1@81.126,114.557 ; 79.38,114.444 P8.1@81.02,115.055 ; 79.38,114.444 P8.1@81.091,114.81 ; 79.445,114.471 P8.1@81.091,114.81 ; 79.445,114.492 P8.1@81.091,114.81 ; 80.228,115.31 P8.1@81.091,115.31 ; 80.228,115.31 P8.1@80.893,114.76 ; 80.228,115.31 P8.1@80.893,115.86 ; 80.228,115.31 P8.1@81.053,115.058 ; 80.228,115.31 P8.1@81.053,115.562 ; 80.228,115.31 P8.1@81.091,115.31 ; 80.228,115.31 P8.1@80.893,114.76 ; 80.228,115.31 P8.1@80.893,115.86 ; 80.228,115.31 P8.1@81.053,115.058 ; 80.228,115.31 P8.1@81.053,115.562 ; 80.228,115.31 P8.1@80.893,114.76 ; 80.228,115.31 P8.1@80.893,115.86 ; 80.228,115.31 P8.1@81.053,115.058 ; 80.228,115.31 P8.1@81.053,115.562 ; 80.228,115.31 P8.1@81.091,115.31 ; 80.228,115.31 P8.1@80.893,114.76 ; 80.228,115.31 P8.1@80.893,115.86 ; 80.228,115.31 P8.1@81.053,115.058 ; 80.228,115.31 P8.1@81.053,115.562 ; 80.228,115.31 P8.1@81.091,115.31 ; 80.228,115.31 P8.1@80.893,114.76 ; 80.228,115.31 P8.1@80.893,115.86 ; 80.228,115.31 P8.1@81.053,115.058 ; 80.228,115.31 P8.1@81.053,115.562 ; 80.228,115.31 P8.1@81.091,115.31 ; 80.228,115.31 P8.1@80.893,114.76 ; 80.228,115.31 P8.1@80.893,115.86 ; 80.228,115.31 P8.1@81.053,115.058 ; 80.228,115.31 P8.1@81.053,115.562 ; 80.228,115.31 P8.1@81.091,115.31 ; 80.228,115.31 P8.1@80.893,114.76 ; 80.228,115.31 P8.1@80.893,115.86 ; 80.228,115.31 P8.1@81.053,115.058 ; 80.228,115.31 P8.1@81.053,115.562 ; 80.228,115.31 P8.1@81.091,115.31 ; 80.228,115.31 P8.1@80.893,114.76 ; 80.228,115.31 P8.1@80.893,115.86 ; 80.228,115.31 P8.1@81.053,115.058 ; 80.228,115.31 P8.1@81.053,115.562 ; 80.228,115.31 P8.1@81.091,115.31 ; 80.228,115.31 P8.1@80.893,114.76 ; 80.228,115.31 P8.1@80.893,115.86 ; 80.228,115.31 P8.1@81.053,115.058 ; 80.228,115.31 P8.1@81.053,115.562 ; 80.228,115.31 P8.1@81.091,115.31 ; 80.228,115.31 P8.1@80.893,114.76 ; 80.228,115.31 P8.1@80.893,115.86 ; 80.228,115.31 P8.1@81.053,115.058 ; 80.228,115.31 P8.1@81.053,115.562 ; 80.228,115.31 P8.1@81.091,115.31 ; 80.228,115.31 P8.1@80.893,114.76 ; 80.228,115.31 P8.1@80.893,115.86 ; 80.228,115.31 P8.1@81.053,115.058 ; 80.228,115.31 P8.1@81.053,115.562 ; 80.228,115.31 P8.1@81.091,115.31 ; 80.228,115.31 P8.1@80.893,114.76 ; 80.228,115.31 P8.1@80.893,115.86 ; 80.228,115.31 P8.1@81.053,115.058 ; 80.228,115.31 P8.1@81.053,115.562 ; 80.228,115.31 P8.1@81.091,115.31 ; 80.228,115.31 P8.1@80.893,114.76 ; 80.228,115.31 P8.1@80.893,115.86 ; 80.228,115.31 P8.1@81.053,115.058 ; 80.228,115.31 P8.1@81.053,115.562 ; 80.228,115.31 P8.1@81.091,115.31 ; P8.1@80.786,114.311 82.481,113.619 ; P8.1@80.786,114.311 82.481,113.619 ; P8.1@80.786,114.311 82.481,113.619 ; P8.1@80.786,114.311 82.481,113.619 ; P8.1@80.786,114.311 82.481,113.619 ; P8.1@80.786,114.311 82.481,113.619 ; P8.1@80.939,114.605 82.481,113.619 ; P8.1@80.939,114.605 82.481,113.619 ; P8.1@80.939,114.605 82.481,113.619 ; P8.1@80.939,114.605 82.481,113.619 ; P8.1@80.939,114.605 82.481,113.619 ; P8.1@80.939,114.605 82.481,113.619 ; P8.1@81.091,114.81 82.481,113.619 ; P8.1@81.091,114.81 82.481,113.619 ; P8.1@81.091,114.81 82.481,113.619 ; P8.1@81.091,114.81 82.47,113.631 ; P8.1@81.091,114.81 82.481,113.619 ; P8.1@81.091,114.81 82.481,113.619 ; P8.1@81.091,114.81 82.481,113.619 ; P8.1@81.27,114.992 82.481,113.619 ; P8.1@81.27,114.992 82.481,113.619 ; P8.1@81.27,114.992 82.481,113.619 ; P8.1@81.27,114.992 82.47,113.631 ; P8.1@81.27,114.992 82.481,113.619 ; P8.1@81.27,114.992 82.481,113.619 ; P8.1@81.27,114.992 82.481,113.619 ; P8.1@81.538,115.188 82.481,113.619 ; P8.1@81.538,115.188 82.481,113.619 ; P8.1@81.538,115.188 82.481,113.619 ; P8.1@81.538,115.188 82.47,113.631 ; P8.1@81.538,115.188 82.481,113.619 ; P8.1@81.538,115.188 82.481,113.619 ; P8.1@81.538,115.188 82.481,113.619 ; U1.40@93.115,99.505 94.547,99.435 ; U1.40@93.115,99.505 94.547,99.435 ; U1.40@93.115,99.505 94.547,99.435 ; U1.40@93.115,99.505 94.547,99.435 ; U1.40@93.115,99.505 94.547,99.435 ; U1.40@93.115,99.505 94.547,99.435 ; U1.40@93.115,99.505 94.547,99.435 ; U1.40@93.137,99.173 94.547,99.435 ; U1.40@93.137,99.173 94.547,99.435 ; U1.40@93.137,99.173 94.547,99.435 ; U1.40@93.137,99.173 94.547,99.435 ; U1.40@93.137,99.173 94.547,99.435 ; U1.40@93.137,99.173 94.547,99.435 ; U1.40@93.137,99.173 94.547,99.435 ; U1.40@93.206,98.927 94.039,98.927 94.547,99.435 ; U1.40@93.206,98.927 94.547,99.435 ; U1.40@93.206,98.927 94.547,99.435 ; U1.40@93.206,98.927 94.547,99.435 ; U1.40@93.206,98.927 94.547,99.435 ; U1.40@93.206,98.927 94.547,99.435 ; U1.40@93.206,98.927 94.547,99.435 ; U1.40@93.317,98.698 94.547,99.435 ; U1.40@93.317,98.698 94.547,99.435 ; U1.40@93.317,98.698 94.547,99.435 ; U1.40@93.317,98.698 94.547,99.435 ; U1.40@93.317,98.698 94.547,99.435 ; U1.40@93.317,98.698 94.547,99.435 ; U1.40@93.317,98.698 94.547,99.435 ; U1.40@93.52,98.434 94.547,99.435 ; U1.40@93.52,98.434 94.547,99.435 ; U1.40@93.52,98.434 94.547,99.435 ; U1.40@93.52,98.434 94.547,99.435 ; U1.40@93.52,98.434 94.547,99.435 ; U1.40@93.52,98.434 94.547,99.435 ; U1.40@93.52,98.434 94.547,99.435 ; 94.547,99.435 94.547,101.487 95.18,102.12 96.399,102.12 ; 96.399,102.12 R2.1@97.442,102.727 ; 96.399,102.12 R2.1@96.435,103.326 ; 96.399,102.12 R2.1@97.235,102.99 ; 96.399,102.12 R2.1@96.765,103.27 ; 96.399,102.12 R2.1@97.016,103.157 ; 96.399,102.12 R2.1@97.442,102.727 ; 96.399,102.12 R2.1@96.435,103.326 ; 96.399,102.12 R2.1@97.235,102.99 ; 96.399,102.12 R2.1@96.765,103.27 ; 96.399,102.12 R2.1@97.016,103.157 ; 96.399,102.12 R2.1@97.442,102.727 ; 96.399,102.12 R2.1@96.435,103.326 ; 96.399,102.12 R2.1@97.235,102.99 ; 96.399,102.12 R2.1@96.765,103.27 ; 96.399,102.12 R2.1@97.016,103.157 ; 96.399,102.12 R2.1@97.442,102.727 ; 96.399,102.12 R2.1@96.435,103.326 ; 96.399,102.12 R2.1@97.235,102.99 ; 96.399,102.12 R2.1@96.765,103.27 ; 96.399,102.12 R2.1@97.016,103.157 ; 96.399,102.12 R2.1@97.442,102.727 ; 96.399,102.12 R2.1@96.435,103.326 ; 96.399,102.12 R2.1@97.235,102.99 ; 96.399,102.12 R2.1@96.765,103.27 ; 96.399,102.12 R2.1@97.016,103.157 ; 96.399,102.12 R2.1@97.442,102.727 ; 96.399,102.12 R2.1@96.435,103.326 ; 96.399,102.12 R2.1@97.235,102.99 ; 96.399,102.12 R2.1@96.765,103.27 ; 96.399,102.12 R2.1@97.016,103.157 ; 96.399,102.12 R2.1@97.442,102.727 ; 96.399,102.12 R2.1@96.435,103.326 ; 96.399,102.12 R2.1@97.235,102.99 ; 96.399,102.12 R2.1@96.765,103.27 ; 96.399,102.12 R2.1@97.016,103.157